# Altium PCB led.PcbDoc (part 2 of 2)
Units mm, origin at the board's own origin, x right, y up, seen from the top; angles counter-clockwise.
Board outline 15 x 336 mm, 2 copper layers (Top Layer, Bottom Layer); 132 components, 245 nets, 940 pads, 191 vias.
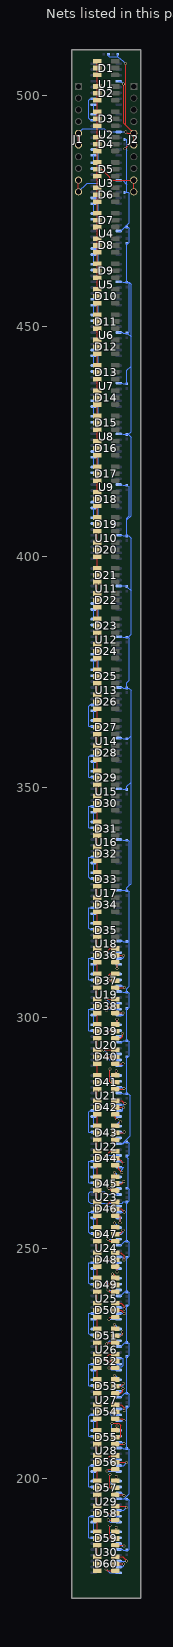
[diagram p2: the nets of this part, all layers, seen from the top]

## Via types
v1: diameter 0.635, hole 0.457, Top Layer to Bottom Layer, 191 vias

## Nets (pads, with @x,y where several pads share a name; then routed paths per layer and width w, separated by ;. In a path a pad name is that pad's centre, name@x,y a point inside that pad or via, vN(x,y) a via of type N, cw(c..) or ccw(c..) an arc to the next point about the centre after c; other vN are vias at no path point) (continued)
NetD36_1: D36.1 U18.8 | length 3
  Top Layer w0.254: D36.1@1024.96,312 1025.373,312 v1(1025.373,310.642)
  Bottom Layer w0.254: v1(1025.373,310.642) 1025.373,311.555 U18.8@1025.725,311.555
NetD36_2: D36.2 U18.7 | length 3.4
  Top Layer w0.254: D36.2@1024.96,313.5 v1(1026.795,313.5)
  Bottom Layer w0.254: U18.7@1025.725,312.825 1026.566,312.825 1026.795,313.054 v1(1026.795,313.5)
NetD36_3: D36.3 U18.6 | length 5
  Top Layer w0.254: v1(1023.01,314.095) 1023.915,315 D36.3@1024.96,315
  Bottom Layer w0.254: v1(1023.01,314.095) U18.6@1025.725,314.095
NetD37_1: D37.1 U19.3 | length 3.4
  Top Layer w0.254: D37.1@1024.96,306.5 v1(1026.947,306.5)
  Bottom Layer w0.254: U19.3@1025.725,306.905 1026.542,306.905 v1(1026.947,306.5)
NetD37_2: D37.2 U19.2 | length 3.8
  Top Layer w0.254: v1(1023.503,308.175) 1023.678,308 D37.2@1024.96,308
  Bottom Layer w0.254: v1(1023.503,308.175) U19.2@1025.725,308.175
NetD37_3: D37.3 U19.1 | length 4
  Top Layer w0.254: v1(1023.671,308.94) 1023.671,309.27 1023.9,309.5 D37.3@1024.96,309.5
  Bottom Layer w0.254: v1(1023.671,308.94) 1024.176,309.445 U19.1@1025.725,309.445
NetD38_1: D38.1 U19.8 | length 3.1
  Top Layer w0.254: D38.1@1024.96,301 v1(1026.693,301)
  Bottom Layer w0.254: U19.8@1025.725,300.555 1026.693,300.555 v1(1026.693,301)
NetD38_2: D38.2 U19.7 | length 5.1
  Top Layer w0.254: v1(1023.036,301.6) 1023.936,302.5 D38.2@1024.96,302.5
  Bottom Layer w0.254: v1(1023.036,301.6) 1023.261,301.825 U19.7@1025.725,301.825
NetD38_3: D38.3 U19.6 | length 5
  Top Layer w0.254: v1(1023.014,304) D38.3@1024.96,304
  Bottom Layer w0.254: v1(1023.014,304) 1023.919,303.095 U19.6@1025.725,303.095
NetD39_1: D39.1 U20.3 | length 3.8
  Top Layer w0.254: D39.1@1024.96,295.5 1026.16,295.5 1026.566,295.906 v1(1026.566,296.52)
  Bottom Layer w0.254: U20.3@1025.725,295.905 1026.566,295.905 v1(1026.566,296.52)
NetD39_2: D39.2 U20.2 | length 4.3
  Top Layer w0.254: v1(1023.214,297) D39.2@1024.96,297
  Bottom Layer w0.254: v1(1023.214,297) 1023.389,297.175 U20.2@1025.725,297.175
NetD39_3: D39.3 U20.1 | length 3.1
  Top Layer w0.254: D39.3@1024.96,298.5 1025.373,298.5 v1(1025.373,299.644)
  Bottom Layer w0.254: v1(1025.373,299.644) 1025.373,298.445 U20.1@1025.725,298.445
NetD40_1: D40.1 U20.8 | length 3
  Top Layer w0.254: D40.1@1024.96,290 v1(1026.693,290)
  Bottom Layer w0.254: U20.8@1025.725,289.555 1026.485,289.555 1026.693,289.763 v1(1026.693,290)
NetD40_2: D40.2 U20.7 | length 5
  Top Layer w0.254: v1(1023.01,291.541) 1023.052,291.5 D40.2@1024.96,291.5
  Bottom Layer w0.254: v1(1023.01,291.541) 1023.727,290.825 U20.7@1025.725,290.825
NetD40_3: D40.3 U20.6 | length 6.2
  Top Layer w0.254: v1(1022.426,293) D40.3@1024.96,293
  Bottom Layer w0.254: v1(1022.426,293) 1023.331,292.095 U20.6@1025.725,292.095
NetD41_1: D41.1 U21.3 | length 3.2
  Top Layer w0.254: D41.1@1024.96,284.5 1026.739,284.5 v1(1026.846,284.607)
  Bottom Layer w0.254: U21.3@1025.725,284.905 1026.548,284.905 v1(1026.846,284.607)
NetD41_2: D41.2 U21.2 | length 8
  Top Layer w0.254: v1(1023.798,288.874) 1023.798,286 D41.2@1024.96,286
  Bottom Layer w0.254: v1(1023.798,288.874) 1023.798,287.318 1024.941,286.175 U21.2@1025.725,286.175
NetD41_3: D41.3 U21.1 | length 2.7
  Top Layer w0.254: D41.3@1024.96,287.5 1025.195,287.5 v1(1025.195,288.417)
  Bottom Layer w0.254: v1(1025.195,288.417) 1025.195,287.445 U21.1@1025.725,287.445
NetD42_1: D42.1 U21.8 | length 2.4
  Top Layer w0.254: D42.1@1024.96,279 1024.941,279 1024.941,278.232 v1(1025.322,277.851)
  Bottom Layer w0.254: v1(1025.322,277.851) 1025.322,278.555 U21.8@1025.725,278.555
NetD42_2: D42.2 U21.7 | length 3.4
  Top Layer w0.254: D42.2@1024.96,280.5 v1(1026.784,280.5)
  Bottom Layer w0.254: U21.7@1025.725,279.825 1026.566,279.825 1026.566,280.283 v1(1026.784,280.5)
NetD42_3: D42.3 U21.6 | length 3.8
  Top Layer w0.254: D42.3@1024.96,282 1026.414,282 v1(1027.074,281.34)
  Bottom Layer w0.254: U21.6@1025.725,281.095 1026.83,281.095 v1(1027.074,281.34)
NetD43_1: D43.1 U22.3 | length 3.5
  Top Layer w0.254: v1(1024.56,272.491) 1024.839,272.771 1024.839,273.5 D43.1@1024.96,273.5
  Bottom Layer w0.254: v1(1024.56,272.491) 1024.746,272.677 1024.746,273.507 1025.144,273.905 U22.3@1025.725,273.905
NetD43_2: D43.2 U22.2 | length 3.2
  Top Layer w0.254: D43.2@1024.96,275 1026.756,275 v1(1026.931,275.175)
  Bottom Layer w0.254: U22.2@1025.725,275.175 v1(1026.931,275.175)
NetD43_3: D43.3 U22.1 | length 3.4
  Top Layer w0.254: D43.3@1024.96,276.5 1025.216,276.5 v1(1026.135,277.419)
  Bottom Layer w0.254: U22.1@1025.725,276.445 1025.322,276.445 1025.322,276.847 1025.893,277.419 v1(1026.135,277.419)
NetD44_1: D44.1 U22.8 | length 5.1
  Top Layer w0.254: D44.1@1024.96,268 1025.721,268 1025.721,267.062 v1(1026.389,266.395)
  Bottom Layer w0.254: U22.8@1025.725,267.555 1026.802,267.555 1026.864,267.493 1026.389,267.017 v1(1026.389,266.395)
NetD44_2: D44.2 U22.7 | length 3.7
  Top Layer w0.254: D44.2@1024.96,269.5 1025.621,269.5 v1(1026.82,268.3)
  Bottom Layer w0.254: U22.7@1025.725,268.825 1026.287,268.825 1026.812,268.3 v1(1026.82,268.3)
NetD44_3: D44.3 U22.6 | length 5
  Top Layer w0.254: v1(1023.01,270.095) 1023.915,271 D44.3@1024.96,271
  Bottom Layer w0.254: v1(1023.01,270.095) U22.6@1025.725,270.095
NetD45_1: D45.1 U23.3 | length 3.7
  Top Layer w0.254: v1(1023.577,262.905) 1023.982,262.5 D45.1@1024.96,262.5
  Bottom Layer w0.254: v1(1023.577,262.905) U23.3@1025.725,262.905
NetD45_2: D45.2 U23.2 | length 3.3
  Top Layer w0.254: D45.2@1024.96,264 1026.356,264 v1(1026.82,264.465)
  Bottom Layer w0.254: U23.2@1025.725,264.175 1026.531,264.175 v1(1026.82,264.465)
NetD45_3: D45.3 U23.1 | length 2.8
  Top Layer w0.254: v1(1024.814,266.395) 1024.814,265.5 D45.3@1024.96,265.5
  Bottom Layer w0.254: v1(1024.814,266.395) 1025.093,266.395 1025.296,266.192 1025.296,265.445 U23.1@1025.725,265.445
NetD46_1: D46.1 U23.8 | length 3.9
  Top Layer w0.254: D46.1@1024.96,257 1026.033,257 v1(1026.033,255.499)
  Bottom Layer w0.254: U23.8@1025.725,256.555 1026.033,256.555 v1(1026.033,255.499)
NetD46_2: D46.2 U23.7 | length 3.4
  Top Layer w0.254: D46.2@1024.96,258.5 1026.247,258.5 v1(1026.922,257.825)
  Bottom Layer w0.254: U23.7@1025.725,257.825 v1(1026.922,257.825)
NetD46_3: D46.3 U23.6 | length 5
  Top Layer w0.254: v1(1023.01,259.095) 1023.915,260 D46.3@1024.96,260
  Bottom Layer w0.254: v1(1023.01,259.095) U23.6@1025.725,259.095
NetD47_1: D47.1 U24.3 | length 4
  Top Layer w0.254: v1(1023.406,251.905) 1023.811,251.5 D47.1@1024.96,251.5
  Bottom Layer w0.254: v1(1023.406,251.905) U24.3@1025.725,251.905
NetD47_2: D47.2 U24.2 | length 3.7
  Top Layer w0.254: D47.2@1024.96,253 1025.957,253 1026.693,253.737 v1(1026.693,253.873)
  Bottom Layer w0.254: U24.2@1025.725,253.175 1026.478,253.175 1026.693,253.39 v1(1026.693,253.873)
NetD47_3: D47.3 U24.1 | length 2.7
  Top Layer w0.254: v1(1024.814,255.397) 1024.814,254.5 D47.3@1024.96,254.5
  Bottom Layer w0.254: v1(1024.814,255.397) 1024.941,255.397 1025.296,255.041 1025.296,254.445 U24.1@1025.725,254.445
NetD48_1: D48.1 U24.8 | length 2.6
  Top Layer w0.254: D48.1@1024.96,246 1025.373,246 v1(1025.373,244.856)
  Bottom Layer w0.254: v1(1025.373,244.856) 1025.373,245.555 U24.8@1025.725,245.555
NetD48_2: D48.2 U24.7 | length 4
  Top Layer w0.254: v1(1023.505,247.5) D48.2@1024.96,247.5
  Bottom Layer w0.254: v1(1023.505,247.5) 1024.18,246.825 U24.7@1025.725,246.825
NetD48_3: D48.3 U24.6 | length 4.9
  Top Layer w0.254: D48.3@1024.96,249 1026.207,249 1026.897,248.31 v1(1026.897,247.396)
  Bottom Layer w0.254: U24.6@1025.725,248.095 1026.693,248.095 1026.693,247.599 v1(1026.897,247.396)
NetD49_1: D49.1 U25.3 | length 4
  Top Layer w0.254: v1(1023.404,240.905) 1023.809,240.5 D49.1@1024.96,240.5
  Bottom Layer w0.254: v1(1023.404,240.905) U25.3@1025.725,240.905
NetD49_2: D49.2 U25.2 | length 4.4
  Top Layer w0.254: v1(1023.322,242.476) 1023.798,242 D49.2@1024.96,242
  Bottom Layer w0.254: v1(1023.322,242.476) 1023.623,242.175 U25.2@1025.725,242.175
NetD49_3: D49.3 U25.1 | length 3.3
  Top Layer w0.254: v1(1024.407,244.399) 1024.534,244.399 1024.814,244.119 1024.814,243.5 D49.3@1024.96,243.5
  Bottom Layer w0.254: v1(1024.407,244.399) 1024.814,243.992 1024.814,243.445 U25.1@1025.725,243.445
NetD50_1: D50.1 U25.8 | length 3.7
  Top Layer w0.254: v1(1023.645,234.555) 1023.645,234.721 1023.925,235 D50.1@1024.96,235
  Bottom Layer w0.254: v1(1023.645,234.555) U25.8@1025.725,234.555
NetD50_2: D50.2 U25.7 | length 3.4
  Top Layer w0.254: D50.2@1024.96,236.5 1026.247,236.5 v1(1026.922,235.825)
  Bottom Layer w0.254: U25.7@1025.725,235.825 v1(1026.922,235.825)
NetD50_3: D50.3 U25.6 | length 4.2
  Top Layer w0.254: D50.3@1024.96,238 1026.26,238 1026.922,237.338 v1(1026.922,236.753)
  Bottom Layer w0.254: U25.6@1025.725,237.095 1026.58,237.095 v1(1026.922,236.753)
NetD51_1: D51.1 U26.3 | length 4.9
  Top Layer w0.254: v1(1023.087,229.184) 1023.402,229.5 D51.1@1024.96,229.5
  Bottom Layer w0.254: v1(1023.087,229.184) 1023.807,229.905 U26.3@1025.725,229.905
NetD51_2: D51.2 U26.2 | length 3.7
  Top Layer w0.254: D51.2@1024.96,231 1026.16,231 1026.592,231.432 v1(1026.592,231.8)
  Bottom Layer w0.254: U26.2@1025.725,231.175 1026.592,231.175 v1(1026.592,231.8)
NetD51_3: D51.3 U26.1 | length 2.7
  Top Layer w0.254: v1(1024.814,233.401) 1024.814,232.5 D51.3@1024.96,232.5
  Bottom Layer w0.254: v1(1024.814,233.401) 1024.966,233.401 1025.296,233.07 1025.296,232.445 U26.1@1025.725,232.445
NetD52_1: D52.1 U26.8 | length 3.6
  Top Layer w0.254: v1(1023.645,224) D52.1@1024.96,224
  Bottom Layer w0.254: v1(1023.645,224) 1024.09,223.555 U26.8@1025.725,223.555
NetD52_2: D52.2 U26.7 | length 3.9
  Top Layer w0.254: v1(1023.645,225.755) 1023.901,225.5 D52.2@1024.96,225.5
  Bottom Layer w0.254: v1(1023.645,225.755) 1024.576,224.825 U26.7@1025.725,224.825
NetD52_3: D52.3 U26.6 | length 9.9
  Top Layer w0.254: v1(1023.595,224.942) 1023.061,225.476 1023.061,226.365 1023.696,227 D52.3@1024.96,227
  Bottom Layer w0.254: v1(1023.595,224.942) 1024.331,224.206 1026.389,224.206 1026.719,224.536 1026.719,226.095 U26.6@1025.725,226.095
NetD53_1: D53.1 U27.3 | length 4
  Top Layer w0.254: D53.1@1024.96,218.5 1026.16,218.5 1026.643,218.983 v1(1026.643,219.558)
  Bottom Layer w0.254: U27.3@1025.725,218.905 1026.617,218.905 1026.617,219.532 v1(1026.643,219.558)
NetD53_2: D53.2 U27.2 | length 3.4
  Top Layer w0.254: D53.2@1024.96,220 1026.135,220 v1(1026.719,220.584)
  Bottom Layer w0.254: U27.2@1025.725,220.175 1026.719,220.175 v1(1026.719,220.584)
NetD53_3: D53.3 U27.1 | length 2.7
  Top Layer w0.254: v1(1024.814,222.402) 1024.814,221.5 D53.3@1024.96,221.5
  Bottom Layer w0.254: v1(1024.814,222.402) 1024.992,222.402 1025.296,222.098 1025.296,221.445 U27.1@1025.725,221.445
NetD54_1: D54.1 U27.8 | length 3.3
  Top Layer w0.254: D54.1@1024.96,213 1026.452,213 v1(1026.897,212.555)
  Bottom Layer w0.254: U27.8@1025.725,212.555 v1(1026.897,212.555)
NetD54_2: D54.2 U27.7 | length 5.2
  Top Layer w0.254: v1(1023.01,214.859) 1023.369,214.5 D54.2@1024.96,214.5
  Bottom Layer w0.254: v1(1023.01,214.859) 1024.044,213.825 U27.7@1025.725,213.825
NetD54_3: D54.3 U27.6 | length 4.2
  Top Layer w0.254: D54.3@1024.96,216 1026.314,216 1026.922,215.392 v1(1026.922,214.757)
  Bottom Layer w0.254: U27.6@1025.725,215.095 1026.584,215.095 v1(1026.922,214.757)
NetD55_1: D55.1 U28.3 | length 3.2
  Top Layer w0.254: D55.1@1024.96,207.5 1026.701,207.5 v1(1026.846,207.645)
  Bottom Layer w0.254: U28.3@1025.725,207.905 1026.586,207.905 v1(1026.846,207.645)
NetD55_2: D55.2 U28.2 | length 9.8
  Top Layer w0.254: v1(1024.23,211.988) 1025.754,211.988 1026.185,211.557 1026.185,209.229 1025.957,209 D55.2@1024.96,209
  Bottom Layer w0.254: v1(1024.23,211.988) 1024.23,209.702 1024.757,209.175 U28.2@1025.725,209.175
NetD55_3: D55.3 U28.1 | length 2.6
  Top Layer w0.254: D55.3@1024.96,210.5 1025.322,210.5 v1(1025.322,211.404)
  Bottom Layer w0.254: v1(1025.322,211.404) 1025.322,210.445 U28.1@1025.725,210.445
NetD56_1: D56.1 U28.8 | length 4.4
  Top Layer w0.254: v1(1023.214,201.676) 1023.538,202 D56.1@1024.96,202
  Bottom Layer w0.254: v1(1023.214,201.676) 1023.335,201.555 U28.8@1025.725,201.555
NetD56_2: D56.2 U28.7 | length 4.5
  Top Layer w0.254: D56.2@1024.96,203.5 v1(1027.455,203.5)
  Bottom Layer w0.254: U28.7@1025.725,202.825 1026.78,202.825 v1(1027.455,203.5)
NetD56_3: D56.3 U28.6 | length 5
  Top Layer w0.254: v1(1023.01,204.095) 1023.915,205 D56.3@1024.96,205
  Bottom Layer w0.254: v1(1023.01,204.095) U28.6@1025.725,204.095
NetD57_1: D57.1 U29.3 | length 3.3
  Top Layer w0.254: D57.1@1024.96,196.5 1026.592,196.5 1026.724,196.367 v1(1026.846,196.367)
  Bottom Layer w0.254: U29.3@1025.725,196.905 1026.308,196.905 v1(1026.846,196.367)
NetD57_2: D57.2 U29.2 | length 8
  Top Layer w0.254: v1(1023.798,200.863) 1023.798,198 D57.2@1024.96,198
  Bottom Layer w0.254: v1(1023.798,200.863) 1023.798,199.318 1024.941,198.175 U29.2@1025.725,198.175
NetD57_3: D57.3 U29.1 | length 2.6
  Top Layer w0.254: D57.3@1024.96,199.5 1025.195,199.5 v1(1025.195,200.406)
  Bottom Layer w0.254: v1(1025.195,200.406) 1025.195,199.445 U29.1@1025.725,199.445
NetD58_1: D58.1 U29.8 | length 4
  Top Layer w0.254: v1(1023.455,191) D58.1@1024.96,191
  Bottom Layer w0.254: v1(1023.455,191) 1023.9,190.555 U29.8@1025.725,190.555
NetD58_2: D58.2 U29.7 | length 5
  Top Layer w0.254: v1(1023.01,192.532) 1023.042,192.5 D58.2@1024.96,192.5
  Bottom Layer w0.254: v1(1023.01,192.532) 1023.717,191.825 U29.7@1025.725,191.825
NetD58_3: D58.3 U29.6 | length 4.5
  Top Layer w0.254: D58.3@1024.96,194 1027.181,194 v1(1027.43,193.751)
  Bottom Layer w0.254: U29.6@1025.725,193.095 1026.774,193.095 v1(1027.43,193.751)
NetD59_1: D59.1 U30.3 | length 3.3
  Top Layer w0.254: D59.1@1024.96,185.5 1026.715,185.5 v1(1026.846,185.369)
  Bottom Layer w0.254: U30.3@1025.725,185.905 1025.982,185.905 1026.518,185.369 v1(1026.846,185.369)
NetD59_2: D59.2 U30.2 | length 8
  Top Layer w0.254: v1(1023.798,189.865) 1023.798,187 D59.2@1024.96,187
  Bottom Layer w0.254: v1(1023.798,189.865) 1023.798,188.318 1024.941,187.175 U30.2@1025.725,187.175
NetD59_3: D59.3 U30.1 | length 2.6
  Top Layer w0.254: D59.3@1024.96,188.5 1025.195,188.5 v1(1025.195,189.408)
  Bottom Layer w0.254: v1(1025.195,189.408) 1025.195,188.445 U30.1@1025.725,188.445
NetD60_1: D60.1 U30.8 | length 5.2
  Top Layer w0.254: v1(1023.01,180.365) 1023.376,180 D60.1@1024.96,180
  Bottom Layer w0.254: v1(1023.01,180.365) 1023.821,179.555 U30.8@1025.725,179.555
NetD60_2: D60.2 U30.7 | length 3.4
  Top Layer w0.254: D60.2@1024.96,181.5 1026.778,181.5 v1(1026.795,181.483)
  Bottom Layer w0.254: U30.7@1025.725,180.825 1026.569,180.825 1026.795,181.051 v1(1026.795,181.483)
NetD60_3: D60.3 U30.6 | length 4.6
  Top Layer w0.254: D60.3@1024.96,183 1026.599,183 v1(1027.455,182.143)
  Bottom Layer w0.254: U30.6@1025.725,182.095 1027.407,182.095 v1(1027.455,182.143)
NetU1_9: U1.9 U2.16 | length 2.1
  Bottom Layer w0.254: U2.16@1020.275,495.945 U1.9@1020.275,498.055
NetU1_10: U1.10 U2.15 | length 6.3
  Bottom Layer w0.254: U2.15@1020.275,494.675 1019.655,494.675 1019.277,495.053 1019.277,499.059 1019.542,499.325 U1.10@1020.275,499.325
NetU2_9: U2.9 U3.16 | length 1.6
  Bottom Layer w0.254: U3.16@1020.275,485.445 U2.9@1020.275,487.055
NetU2_10: U2.10 U3.15 | length 5.8
  Bottom Layer w0.254: U3.15@1020.275,484.175 1021.004,484.175 1021.258,484.429 1021.258,488.086 1021.019,488.325 U2.10@1020.275,488.325
NetU3_9: U3.9 U4.16 | length 2.1
  Bottom Layer w0.254: U4.16@1020.275,474.445 U3.9@1020.275,476.555
NetU3_10: U3.10 U4.15 | length 6.6
  Bottom Layer w0.254: U4.15@1020.275,473.175 1021.258,473.175 1021.258,477.825 U3.10@1020.275,477.825
NetU4_9: U4.9 U5.16 | length 2.1
  Bottom Layer w0.254: U5.16@1020.275,463.445 U4.9@1020.275,465.555
NetU4_10: U4.10 U5.15 | length 6.6
  Bottom Layer w0.254: U5.15@1020.275,462.175 1021.258,462.175 1021.258,466.825 U4.10@1020.275,466.825
NetU5_9: U5.9 U6.16 | length 2.1
  Bottom Layer w0.254: U6.16@1020.275,452.445 U5.9@1020.275,454.555
NetU5_10: U5.10 U6.15 | length 6.5
  Bottom Layer w0.254: U6.15@1020.275,451.175 1021.258,451.175 1021.258,455.574 1021.007,455.825 U5.10@1020.275,455.825
NetU6_9: U6.9 U7.16 | length 2.1
  Bottom Layer w0.254: U7.16@1020.275,441.445 U6.9@1020.275,443.555
NetU6_10: U6.10 U7.15 | length 6.5
  Bottom Layer w0.254: U7.15@1020.275,440.175 1021.258,440.175 1021.258,444.602 1021.034,444.825 U6.10@1020.275,444.825
NetU7_9: U7.9 U8.16 | length 2.1
  Bottom Layer w0.254: U8.16@1020.275,430.445 U7.9@1020.275,432.555
NetU7_10: U7.10 U8.15 | length 6.6
  Bottom Layer w0.254: U8.15@1020.275,429.175 1021.258,429.175 1021.258,433.825 U7.10@1020.275,433.825
NetU8_9: U8.9 U9.16 | length 2.1
  Bottom Layer w0.254: U9.16@1020.275,419.445 U8.9@1020.275,421.555
NetU8_10: U8.10 U9.15 | length 6.5
  Bottom Layer w0.254: U9.15@1020.275,418.175 1021.044,418.175 1021.258,418.389 1021.258,422.825 U8.10@1020.275,422.825
NetU9_9: U9.9 U10.16 | length 2.1
  Bottom Layer w0.254: U10.16@1020.275,408.445 U9.9@1020.275,410.555
NetU9_10: U9.10 U10.15 | length 6.5
  Bottom Layer w0.254: U10.15@1020.275,407.175 1021.017,407.175 1021.258,407.416 1021.258,411.825 U9.10@1020.275,411.825
NetU11_9: U11.9 U12.16 | length 2.1
  Bottom Layer w0.254: U12.16@1020.275,386.445 U11.9@1020.275,388.555
NetU11_10: U11.10 U12.15 | length 6.6
  Bottom Layer w0.254: U12.15@1020.275,385.175 1021.258,385.175 1021.258,389.825 U11.10@1020.275,389.825
NetU12_9: U12.9 U13.16 | length 2.1
  Bottom Layer w0.254: U13.16@1020.275,375.445 U12.9@1020.275,377.555
NetU12_10: U12.10 U13.15 | length 6.6
  Bottom Layer w0.254: U13.15@1020.275,374.175 1021.258,374.175 1021.258,378.825 U12.10@1020.275,378.825
NetU13_9: U13.9 U14.16 | length 2.1
  Bottom Layer w0.254: U14.16@1020.275,364.445 U13.9@1020.275,366.555
NetU13_10: U13.10 U14.15 | length 6.5
  Bottom Layer w0.254: U14.15@1020.275,363.175 1019.277,363.175 1019.277,367.589 1019.513,367.825 U13.10@1020.275,367.825
NetU14_9: U14.9 U15.16 | length 2.1
  Bottom Layer w0.254: U15.16@1020.275,353.445 U14.9@1020.275,355.555
NetU14_10: U14.10 U15.15 | length 6.5
  Bottom Layer w0.254: U15.15@1020.275,352.175 1019.277,352.175 1019.277,356.616 1019.486,356.825 U14.10@1020.275,356.825
NetU15_9: U15.9 U16.16 | length 2.1
  Bottom Layer w0.254: U16.16@1020.275,342.445 U15.9@1020.275,344.555
NetU15_10: U15.10 U16.15 | length 6.6
  Bottom Layer w0.254: U16.15@1020.275,341.175 1019.277,341.175 1019.277,345.825 U15.10@1020.275,345.825
NetU16_9: U16.9 U17.16 | length 2.1
  Bottom Layer w0.254: U17.16@1020.275,331.445 U16.9@1020.275,333.555
NetU16_10: U16.10 U17.15 | length 6.5
  Bottom Layer w0.254: U17.15@1020.275,330.175 1019.505,330.175 1019.277,330.403 1019.277,334.825 U16.10@1020.275,334.825
NetU17_9: U17.9 U18.16 | length 2.1
  Bottom Layer w0.254: U18.16@1020.275,320.445 U17.9@1020.275,322.555
NetU17_10: U17.10 U18.15 | length 6.5
  Bottom Layer w0.254: U18.15@1020.275,319.175 1019.532,319.175 1019.277,319.43 1019.277,323.825 U17.10@1020.275,323.825
NetU18_9: U18.9 U19.16 | length 2.1
  Bottom Layer w0.254: U19.16@1020.275,309.445 U18.9@1020.275,311.555
NetU18_10: U18.10 U19.15 | length 6.6
  Bottom Layer w0.254: U19.15@1020.275,308.175 1019.277,308.175 1019.277,312.825 U18.10@1020.275,312.825
NetU19_9: U19.9 U20.16 | length 2.1
  Bottom Layer w0.254: U20.16@1020.275,298.445 U19.9@1020.275,300.555
NetU19_10: U19.10 U20.15 | length 6.6
  Bottom Layer w0.254: U20.15@1020.275,297.175 1019.277,297.175 1019.277,301.825 U19.10@1020.275,301.825
NetU21_9: U21.9 U22.16 | length 2.1
  Bottom Layer w0.254: U22.16@1020.275,276.445 U21.9@1020.275,278.555
NetU21_10: U21.10 U22.15 | length 6.5
  Bottom Layer w0.254: U22.15@1020.275,275.175 1019.277,275.175 1019.277,279.603 1019.498,279.825 U21.10@1020.275,279.825
NetU22_9: U22.9 U23.16 | length 2.1
  Bottom Layer w0.254: U23.16@1020.275,265.445 U22.9@1020.275,267.555
NetU22_10: U22.10 U23.15 | length 6.6
  Bottom Layer w0.254: U23.15@1020.275,264.175 1019.277,264.175 1019.277,268.825 U22.10@1020.275,268.825
NetU23_9: U23.9 U24.16 | length 2.1
  Bottom Layer w0.254: U24.16@1020.275,254.445 U23.9@1020.275,256.555
NetU23_10: U23.10 U24.15 | length 6.5
  Bottom Layer w0.254: U24.15@1020.275,253.175 1019.492,253.175 1019.277,253.39 1019.277,257.825 U23.10@1020.275,257.825
NetU24_9: U24.9 U25.16 | length 2.1
  Bottom Layer w0.254: U25.16@1020.275,243.445 U24.9@1020.275,245.555
NetU24_10: U24.10 U25.15 | length 6.5
  Bottom Layer w0.254: U25.15@1020.275,242.175 1019.519,242.175 1019.277,242.418 1019.277,246.825 U24.10@1020.275,246.825
NetU25_9: U25.9 U26.16 | length 2.1
  Bottom Layer w0.254: U26.16@1020.275,232.445 U25.9@1020.275,234.555
NetU25_10: U25.10 U26.15 | length 6.5
  Bottom Layer w0.254: U26.15@1020.275,231.175 1019.546,231.175 1019.277,231.445 1019.277,235.825 U25.10@1020.275,235.825
NetU26_9: U26.9 U27.16 | length 2.1
  Bottom Layer w0.254: U27.16@1020.275,221.445 U26.9@1020.275,223.555
NetU26_10: U26.10 U27.15 | length 6.6
  Bottom Layer w0.254: U27.15@1020.275,220.175 1019.277,220.175 1019.277,224.825 U26.10@1020.275,224.825
NetU27_9: U27.9 U28.16 | length 2.1
  Bottom Layer w0.254: U28.16@1020.275,210.445 U27.9@1020.275,212.555
NetU27_10: U27.10 U28.15 | length 6.5
  Bottom Layer w0.254: U28.15@1020.275,209.175 1019.277,209.175 1019.277,213.563 1019.538,213.825 U27.10@1020.275,213.825
NetU28_9: U28.9 U29.16 | length 2.1
  Bottom Layer w0.254: U29.16@1020.275,199.445 U28.9@1020.275,201.555
NetU28_10: U28.10 U29.15 | length 6.5
  Bottom Layer w0.254: U29.15@1020.275,198.175 1019.277,198.175 1019.277,202.59 1019.511,202.825 U28.10@1020.275,202.825
NetU29_9: U29.9 U30.16 | length 2.1
  Bottom Layer w0.254: U30.16@1020.275,188.445 U29.9@1020.275,190.555
NetU29_10: U29.10 U30.15 | length 6.5
  Bottom Layer w0.254: U30.15@1020.275,187.175 1019.277,187.175 1019.277,191.618 1019.484,191.825 U29.10@1020.275,191.825
VCC: C1.1 C2.1 C3.1 C4.1 C5.1 C6.1 C7.1 C8.1 C9.1 C10.1 C11.2 C12.2 C13.2 C14.2 C15.2 C16.2 C17.2 C18.2 C19.2 C20.2 C21.1 C22.1 C23.1 C24.1 C25.1 C26.1 C27.1 C28.1 C29.1 C30.1 C31.2 C32.2 C33.2 C34.2 C35.2 C36.2 C37.2 C38.2 C39.2 C40.2 J1.5 J1.6 J2.5 J2.6 U1.4 U2.4 U3.4 U4.4 U5.4 U6.4 U7.4 U8.4 U9.4 U10.4 U11.4 U12.4 U13.4 U14.4 U15.4 U16.4 U17.4 U18.4 U19.4 U20.4 U21.4 U22.4 U23.4 U24.4 U25.4 U26.4 U27.4 U28.4 U29.4 U30.4 | length 488.5
  Top Layer w0.254: J1.6@1017,489.3 J1.5@1017,491.84 ; v1(1026.781,502.514) 1026.781,494.059 1027.222,493.618 ; v1(1027.125,488.493) 1027.932,489.3 J2.6@1029,489.3 J2.5@1029,491.84 ; v1(1027.222,506.989) 1027.222,493.618 ; v1(1027.252,492.135) 1027.547,491.84 J2.5@1029,491.84 ; 1027.222,493.618 J2.5@1029,491.84
  Bottom Layer w0.254: J1.6@1017,489.3 J1.5@1017,491.84 1017.971,492.811 1022.639,492.811 1023.315,492.135 U2.4@1025.725,492.135 v1(1027.252,492.135) ; C11.2@1023.5,509 1023.5,508.704 1023.722,508.483 1025.5,508.483 ; C1.1@1025.5,509 1025.5,508.483 ; U30.4@1025.725,184.635 1026.541,184.635 1026.676,184.5 C35.2@1027.5,184.5 1027.805,184.5 1028.014,184.709 1028.014,195.275 1027.789,195.5 C34.2@1027.5,195.5 1027.238,195.5 1027.103,195.635 1026.977,195.635 ; U29.4@1025.725,195.635 1026.977,195.635 ; U28.4@1025.725,206.635 1026.541,206.635 1026.676,206.5 C33.2@1027.5,206.5 ; U27.4@1025.725,217.635 1026.16,217.635 1027.025,218.5 C32.2@1027.5,218.5 ; U26.4@1025.725,228.635 1026.16,228.635 1027.025,229.5 C10.1@1027.5,229.5 ; U25.4@1025.725,239.635 1026.16,239.635 1027.025,240.5 C30.1@1027.5,240.5 ; U24.4@1025.725,250.635 1026.16,250.635 1027.025,251.5 C29.1@1027.5,251.5 ; U23.4@1025.725,261.635 1023.122,261.635 1022.553,262.204 1019.556,262.204 1019.277,261.925 1019.277,260.096 1019.632,259.74 1026.459,259.74 1026.719,260 C28.1@1027.5,260 ; U22.4@1025.725,272.635 1026.456,272.635 ; U21.4@1025.725,283.635 1026.541,283.635 1026.676,283.5 C26.1@1027.5,283.5 ; U20.4@1025.725,294.635 1026.414,294.635 1026.779,295 C8.1@1027.5,295 ; U19.4@1025.725,305.635 1026.541,305.635 1026.676,305.5 C24.1@1027.5,305.5 ; U18.4@1025.725,316.635 1026.541,316.635 1026.676,316.5 C7.1@1027.5,316.5 1027.786,316.5 1028.014,316.729 ; U17.4@1025.725,327.635 1027.094,327.635 1027.229,327.5 C5.1@1027.5,327.5 ; U16.4@1025.725,338.635 1026.541,338.635 1026.676,338.5 C23.1@1027.5,338.5 1027.786,338.5 1028.04,338.246 1028.04,328.708 ; U15.4@1025.725,349.635 1026.541,349.635 1026.676,349.5 C6.1@1027.5,349.5 1027.5,350.209 1028.395,351.104 ; U14.4@1025.725,360.635 1026.541,360.635 1026.676,360.5 C21.1@1027.5,360.5 1027.786,360.5 1028.395,361.11 ; U13.4@1025.725,371.635 1026.541,371.635 1026.676,371.5 C20.2@1027.5,371.5 ; U12.4@1025.725,382.635 1026.541,382.635 1026.676,382.5 C19.2@1027.5,382.5 1027.786,382.5 ; U11.4@1025.725,393.635 1027.379,393.635 C18.2@1027.507,393.507 ; U10.4@1025.725,404.635 1026.541,404.635 1026.676,404.5 C17.2@1027.5,404.5 ; U9.4@1025.725,415.635 1026.541,415.635 1026.676,415.5 C4.1@1027.5,415.5 1028.014,415.246 1028.014,408.889 1027.5,408.375 1027.5,407.994 ; U8.4@1025.725,426.635 1026.541,426.635 1026.676,426.5 C22.1@1027.5,426.5 ; U7.4@1025.725,437.635 1026.541,437.635 1026.676,437.5 C3.1@1027.5,437.5 1027.5,440.385 1028.395,441.28 ; U6.4@1025.725,448.635 1026.541,448.635 1026.676,448.5 C16.2@1027.5,448.5 C16.2@1027.608,448.5 ; U5.4@1025.725,459.635 1026.541,459.635 1026.676,459.5 C15.2@1027.5,459.5 ; U4.4@1025.725,470.635 U4.4@1026.16,470.635 ; U3.4@1025.725,481.635 1026.566,481.635 ; U1.4@1025.725,503.135 1026.16,503.135 v1(1026.781,502.514) ; C13.2@1027,479 1027.506,479 ; C12.2@1027,490.5 1027.506,490.5 1027.506,488.112 ; v1(1027.125,488.493) 1027.506,488.112 ; v1(1027.222,506.989) 1025.5,508.483 ; C9.1@1027.5,263 1027.786,263 ; C18.2@1027.5,393.5 C18.2@1027.507,393.507 ; U4.4@1026.16,470.635 1026.209,470.635 1027.074,471.5 ; U4.4@1026.16,470.635 1027.025,471.5 1027.074,471.5 ; 1026.456,272.635 1028.192,274.371 1028.192,283.094 1027.786,283.5 C26.1@1027.5,283.5 ; 1026.456,272.635 1026.66,272.635 1027.025,273 C27.1@1027.5,273 1027.786,273 1028.014,272.771 1028.014,270.205 1027.809,270 C39.2@1027.5,270 1027.5,269.694 1027.796,269.398 1027.796,263.011 1027.786,263 ; 1026.566,481.635 1027.354,481.635 1027.506,481.787 ; 1026.566,481.635 1027.506,480.695 ; 1026.977,195.635 1028.04,196.698 1028.04,206.248 1027.788,206.5 C33.2@1027.5,206.5 ; 1027.074,471.5 1028.04,472.465 1028.04,478.746 1027.786,479 1027.506,479 ; 1027.074,471.5 C2.1@1027.5,471.5 1027.786,471.5 1028.014,471.271 1028.014,468.224 1027.791,468 C14.2@1027.5,468 C15.2@1027.5,459.5 ; C33.2@1027.5,206.5 C36.2@1027.5,215.5 1027.792,215.5 1028.014,215.722 1028.014,218.271 1027.786,218.5 C32.2@1027.5,218.5 ; C32.2@1027.5,218.5 C31.2@1027.5,226.5 1027.794,226.5 1028.014,226.72 1028.014,229.271 1027.786,229.5 C10.1@1027.5,229.5 ; C10.1@1027.5,229.5 C37.2@1027.5,237.5 1027.796,237.5 1028.014,237.719 1028.014,240.271 1027.786,240.5 C30.1@1027.5,240.5 ; C30.1@1027.5,240.5 C38.2@1027.5,248 1027.805,248 1028.014,248.209 1028.014,251.271 1027.786,251.5 C29.1@1027.5,251.5 ; C29.1@1027.5,251.5 C28.1@1027.5,260 ; C28.1@1027.5,260 1027.786,260 1028.014,260.229 1028.014,262.771 1027.786,263 ; C26.1@1027.5,283.5 C25.1@1027.5,291.5 1027.795,291.5 1028.014,291.719 1028.014,294.771 1027.786,295 C8.1@1027.5,295 ; C8.1@1027.5,295 C40.2@1027.5,302 1027.786,302 1028.014,302.229 1028.014,305.271 1027.786,305.5 C24.1@1027.5,305.5 ; C24.1@1027.5,305.5 1027.5,306.242 1028.014,306.756 1028.014,316.729 ; C5.1@1027.5,327.5 1027.5,328.168 1028.04,328.708 ; C5.1@1027.5,327.5 1027.786,327.5 1028.014,327.271 1028.014,316.729 ; C20.2@1027.5,371.5 1027.938,371.5 1028.395,371.043 1028.395,361.11 ; C20.2@1027.5,371.5 1027.5,372.637 1028.04,373.177 1028.04,382.246 1027.786,382.5 ; C17.2@1027.5,404.5 1027.5,407.994 ; C17.2@1027.5,404.5 1027.857,404.5 1028.395,403.962 1028.395,392.619 ; 1027.5,407.994 1028.395,408.889 1028.395,425.907 1027.798,426.504 ; C22.1@1027.5,426.5 1027.798,426.504 ; C22.1@1027.5,426.5 1027.794,426.5 1027.798,426.504 ; C15.2@1027.5,459.5 1027.786,459.5 ; 1027.506,479 1027.506,480.695 ; 1027.506,480.695 1027.506,481.787 ; 1027.506,481.787 1027.506,488.112 ; C18.2@1027.507,393.507 1028.395,392.619 ; C16.2@1027.608,448.5 1027.786,448.5 1028.04,448.754 1028.04,459.246 1027.786,459.5 ; C16.2@1027.608,448.5 1028.395,447.713 ; 1027.786,382.5 1028.395,383.11 1028.395,392.619 ; 1027.786,459.5 1028.04,459.5 1028.395,459.144 1028.395,447.713 ; 1027.798,426.504 1028.395,427.101 1028.395,441.28 ; 1028.04,328.708 1028.395,329.063 1028.395,351.104 ; 1028.395,351.104 1028.395,361.11 ; 1028.395,441.28 1028.395,447.713
VCCBAT: D1.4 D1.5 D1.6 D2.4 D2.5 D2.6 D3.4 D3.5 D3.6 D4.4 D4.5 D4.6 D5.4 D5.5 D5.6 D6.4 D6.5 D6.6 D7.4 D7.5 D7.6 D8.4 D8.5 D8.6 D9.4 D9.5 D9.6 D10.4 D10.5 D10.6 D11.4 D11.5 D11.6 D12.4 D12.5 D12.6 D13.4 D13.5 D13.6 D14.4 D14.5 D14.6 D15.4 D15.5 D15.6 D16.4 D16.5 D16.6 D17.4 D17.5 D17.6 D18.4 D18.5 D18.6 D19.4 D19.5 D19.6 D20.4 D20.5 D20.6 D21.4 D21.5 D21.6 D22.4 D22.5 D22.6 D23.4 D23.5 D23.6 D24.4 D24.5 D24.6 D25.4 D25.5 D25.6 D26.4 D26.5 D26.6 D27.4 D27.5 D27.6 D28.4 D28.5 D28.6 D29.4 D29.5 D29.6 D30.4 D30.5 D30.6 D31.4 D31.5 D31.6 D32.4 D32.5 D32.6 D33.4 D33.5 D33.6 D34.4 D34.5 D34.6 D35.4 D35.5 D35.6 D36.4 D36.5 D36.6 D37.4 D37.5 D37.6 D38.4 D38.5 D38.6 D39.4 D39.5 D39.6 D40.4 D40.5 D40.6 D41.4 D41.5 D41.6 D42.4 D42.5 D42.6 D43.4 D43.5 D43.6 D44.4 D44.5 D44.6 D45.4 D45.5 D45.6 D46.4 D46.5 D46.6 D47.4 D47.5 D47.6 D48.4 D48.5 D48.6 D49.4 D49.5 D49.6 D50.4 D50.5 D50.6 D51.4 D51.5 D51.6 D52.4 D52.5 D52.6 D53.4 D53.5 D53.6 D54.4 D54.5 D54.6 D55.4 D55.5 D55.6 D56.4 D56.5 D56.6 D57.4 D57.5 D57.6 D58.4 D58.5 D58.6 D59.4 D59.5 D59.6 D60.4 D60.5 D60.6 J1.9 J1.10 J2.9 J2.10 | length 347.2
  Top Layer w0.254: J1.10@1017,479.14 J1.9@1017,481.68 ; D60.6@1021.04,180 D60.5@1021.04,181.5 D60.4@1021.04,183 D59.6@1021.04,185.5 D59.5@1021.04,187 D59.4@1021.04,188.5 D58.6@1021.04,191 D58.5@1021.04,192.5 D58.4@1021.04,194 D57.6@1021.04,196.5 D57.5@1021.04,198 D57.4@1021.04,199.5 D56.6@1021.04,202 D56.5@1021.04,203.5 D56.4@1021.04,205 D55.6@1021.04,207.5 D55.5@1021.04,209 D55.4@1021.04,210.5 D54.6@1021.04,213 D54.5@1021.04,214.5 D54.4@1021.04,216 D53.6@1021.04,218.5 D53.5@1021.04,220 D53.4@1021.04,221.5 D52.6@1021.04,224 D52.5@1021.04,225.5 D52.4@1021.04,227 D51.6@1021.04,229.5 D51.5@1021.04,231 D51.4@1021.04,232.5 D50.6@1021.04,235 D50.5@1021.04,236.5 D50.4@1021.04,238 D49.6@1021.04,240.5 D49.5@1021.04,242 D49.4@1021.04,243.5 D48.6@1021.04,246 D48.5@1021.04,247.5 D48.4@1021.04,249 D47.6@1021.04,251.5 D47.5@1021.04,253 D47.4@1021.04,254.5 D46.6@1021.04,257 D46.5@1021.04,258.5 D46.4@1021.04,260 D45.6@1021.04,262.5 D45.5@1021.04,264 D45.4@1021.04,265.5 D44.6@1021.04,268 D44.5@1021.04,269.5 D44.4@1021.04,271 D43.6@1021.04,273.5 D43.5@1021.04,275 D43.4@1021.04,276.5 D42.6@1021.04,279 D42.5@1021.04,280.5 D42.4@1021.04,282 D41.6@1021.04,284.5 D41.5@1021.04,286 D41.4@1021.04,287.5 D40.6@1021.04,290 D40.5@1021.04,291.5 D40.4@1021.04,293 D39.6@1021.04,295.5 D39.5@1021.04,297 D39.4@1021.04,298.5 D38.6@1021.04,301 D38.5@1021.04,302.5 D38.4@1021.04,304 D37.6@1021.04,306.5 D37.5@1021.04,308 D37.4@1021.04,309.5 D36.6@1021.04,312 D36.5@1021.04,313.5 D36.4@1021.04,315 D35.6@1021.04,317.5 D35.5@1021.04,319 D35.4@1021.04,320.5 D34.6@1021.04,323 D34.5@1021.04,324.5 D34.4@1021.04,326 D33.6@1021.04,328.5 D33.5@1021.04,330 D33.4@1021.04,331.5 D32.6@1021.04,334 D32.5@1021.04,335.5 D32.4@1021.04,337 D31.6@1021.04,339.5 D31.5@1021.04,341 D31.4@1021.04,342.5 D30.6@1021.04,345 D30.5@1021.04,346.5 D30.4@1021.04,348 D29.6@1021.04,350.5 D29.5@1021.04,352 D29.4@1021.04,353.5 D28.6@1021.04,356 D28.5@1021.04,357.5 D28.4@1021.04,359 D27.6@1021.04,361.5 D27.5@1021.04,363 D27.4@1021.04,364.5 D26.6@1021.04,367 D26.5@1021.04,368.5 D26.4@1021.04,370 D25.6@1021.04,372.5 D25.5@1021.04,374 D25.4@1021.04,375.5 D24.6@1021.04,378 D24.5@1021.04,379.5 D24.4@1021.04,381 D23.6@1021.04,383.5 D23.5@1021.04,385 D23.4@1021.04,386.5 D22.6@1021.04,389 D22.5@1021.04,390.5 D22.4@1021.04,392 D21.6@1021.04,394.5 D21.5@1021.04,396 D21.4@1021.04,397.5 D20.6@1021.04,400 D20.5@1021.04,401.5 D20.4@1021.04,403 D19.6@1021.04,405.5 D19.5@1021.04,407 D19.4@1021.04,408.5 D18.6@1021.04,411 D18.5@1021.04,412.5 D18.4@1021.04,414 D17.6@1021.04,416.5 D17.5@1021.04,418 D17.4@1021.04,419.5 D16.6@1021.04,422 D16.5@1021.04,423.5 D16.4@1021.04,425 D15.6@1021.04,427.5 D15.5@1021.04,429 D15.4@1021.04,430.5 D14.6@1021.04,433 D14.5@1021.04,434.5 D14.4@1021.04,436 D13.6@1021.04,438.5 D13.5@1021.04,440 D13.4@1021.04,441.5 D12.6@1021.04,444 D12.5@1021.04,445.5 D12.4@1021.04,447 D11.6@1021.04,449.5 D11.5@1021.04,451 D11.4@1021.04,452.5 D10.6@1021.04,455 D10.5@1021.04,456.5 D10.4@1021.04,458 D9.6@1021.04,460.5 D9.5@1021.04,462 D9.4@1021.04,463.5 D8.6@1021.04,466 D8.5@1021.04,467.5 D8.4@1021.04,469 D7.6@1021.04,471.5 D7.5@1021.04,473 D7.4@1021.04,474.5 D6.6@1021.04,477 D6.5@1021.04,478.5 D6.4@1021.04,480 v1@1021.04,481.228 ; D1.4@1021.04,507.5 D1.5@1021.04,506 D1.6@1021.04,504.5 D2.4@1021.04,502 D2.5@1021.04,500.5 D2.6@1021.04,499 D3.4@1021.04,496.5 D3.5@1021.04,495 D3.6@1021.04,493.5 D4.4@1021.04,491 D4.5@1021.04,489.5 D4.6@1021.04,488 D5.4@1021.04,485.5 D5.5@1021.04,484 ; v1(1021.347,481.19) v1@1021.04,481.228 ; J2.10@1029,479.14 J2.9@1029,481.68 1024.108,481.68 1023.798,481.99 1023.798,482.298 1022.096,484 D5.5@1021.04,484 ; v1@1021.04,481.228 D5.6@1021.04,482.5 D5.5@1021.04,484
  Bottom Layer w0.254: J1.10@1017,479.14 1018.885,481.025 1021.182,481.025 v1(1021.347,481.19)
pads on no net: U1.11 U1.12 U1.14 U2.11 U2.12 U2.14 U3.11 U3.12 U3.14 U4.11 U4.12 U4.14 U5.11 U5.12 U5.14 U6.11 U6.12 U6.14 U7.11 U7.12 U7.14 U8.11 U8.12 U8.14 U9.11 U9.12 U9.14 U10.11 U10.12 U10.14 U11.11 U11.12 U11.14 U12.11 U12.12 U12.14 U13.11 U13.12 U13.14 U14.11 U14.12 U14.14 U15.11 U15.12 U15.14 U16.11 U16.12 U16.14 U17.11 U17.12 U17.14 U18.11 U18.12 U18.14 U19.11 U19.12 U19.14 U20.11 U20.12 U20.14 U21.11 U21.12 U21.14 U22.11 U22.12 U22.14 U23.11 U23.12 U23.14 U24.11 U24.12 U24.14 U25.11 U25.12 U25.14 U26.11 U26.12 U26.14 U27.11 U27.12 U27.14 U28.11 U28.12 U28.14 U29.11 U29.12 U29.14 U30.11 U30.12 U30.14
copper on no net: | length 396
  Top Layer w0.254: 781.525,570.284 789.148,570.284 791.689,570.284 792.452,570.284 ; 781.525,580.43 789.148,580.43 791.689,580.43 792.452,580.43 ; 781.525,590.575 789.148,590.575 791.689,590.575 792.452,590.575 ; 781.525,600.72 789.148,600.72 791.689,600.72 792.452,600.72 ; 781.525,610.866 789.148,610.866 791.689,610.866 792.452,610.866 ; 781.525,620.969 789.148,620.969 791.689,620.969 792.452,620.969 ; 781.525,631.115 789.148,631.115 791.689,631.115 792.452,631.115 ; 781.525,641.26 789.148,641.26 791.689,641.26 792.452,641.26 ; 781.525,651.405 789.148,651.405 791.689,651.405 792.452,651.405 ; 789.148,560.139 791.689,560.139 792.452,560.139 ; 792.452,558.11 792.452,562.168 ; 792.452,568.255 792.452,572.313 ; 792.452,578.4 792.452,582.459 ; 792.452,588.546 792.452,592.604 ; 792.452,598.691 792.452,602.75 ; 792.452,608.837 792.452,612.853 ; 792.452,618.94 792.452,622.998 ; 792.452,629.085 792.452,633.144 ; 792.452,639.231 792.452,643.289 ; 792.452,649.376 792.452,653.435 ; 793.468,558.11 793.468,562.168 ; 793.468,560.139 794.231,560.139 796.772,560.139 804.395,560.139 804.395,570.284 ; 793.468,568.255 793.468,572.313 ; 793.468,570.284 794.231,570.284 796.772,570.284 804.395,570.284 ; 793.468,578.4 793.468,582.459 ; 793.468,580.43 794.231,580.43 796.772,580.43 804.395,580.43 ; 793.468,588.546 793.468,592.604 ; 793.468,590.575 794.231,590.575 796.772,590.575 804.395,590.575 ; 793.468,598.691 793.468,602.75 ; 793.468,600.72 794.231,600.72 796.772,600.72 804.395,600.72 ; 793.468,608.837 793.468,612.853 ; 793.468,610.866 794.231,610.866 796.772,610.866 804.395,610.866 ; 793.468,618.94 793.468,622.998 ; 793.468,620.969 794.231,620.969 796.772,620.969 804.395,620.969 ; 793.468,629.085 793.468,633.144 ; 793.468,631.115 794.231,631.115 796.772,631.115 804.395,631.115 ; 793.468,639.231 793.468,643.289 ; 793.468,641.26 794.231,641.26 796.772,641.26 804.395,641.26 ; 793.468,649.376 793.468,653.435 ; 793.468,651.405 794.231,651.405 796.772,651.405 804.395,651.405 ; 812.019,656.478 804.395,656.478 804.395,651.405 ; 804.395,570.284 804.395,580.43 ; 804.395,580.43 804.395,590.575 ; 804.395,590.575 804.395,600.72 ; 804.395,600.72 804.395,610.866 ; 804.395,610.866 804.395,620.969 ; 804.395,620.969 804.395,631.115 ; 804.395,631.115 804.395,641.26 ; 804.395,641.26 804.395,651.405

## Polygon pours and split planes (outlines as drawn)
GND on Bottom Layer "GND" (solid, remove dead copper, pour order 4): 1015.5,510 1023,510 1023,174.5 1015.5,174.5
VCC on Bottom Layer "VCC" (solid, remove dead copper, pour order 2): 1023.5,509 1023.5,174.5 1030.5,174.5 1030.5,509
VCCBAT on Top Layer "VCCBATTOP" (solid, remove dead copper, pour order 6): 1016.951,510.075 1029,510.075 1029,175.075 1017.451,175.075 1017.451,509.575 1016.951,509.575

## Other copper
Top Layer:
  region: 780,555
  region: 780,555
  region: 780,555
  region: 780,555
  region: 780,555
  region: 780,555
  region: 780,555
  region: 780,555
  region: 780,555
  region: 780,555
  region: 780,555
  region: 780,555
  region: 780,555
  region: 780,555
  region: 780,555
  region: 780,555
  region: 780,555
  region: 780,555
  region: 780,555
  region: 780,555
  region: 780,555
  region: 780,555
  region: 780,555
  region: 780,555
  region: 780,555
  region: 780,555
  region: 780,555
  region: 780,555
  region: 780,555
  region: 780,555
  region: 780,555
  region: 780,555
  region: 780,555
  region: 780,555
  region: 780,555
  region: 780,555
  region: 780,555
  region: 780,555
  region: 780,555
  region: 780,555
  region: 780,555
  region: 780,555
  region: 780,555
  region: 780,555
  region: 780,555
  region: 780,555
  region: 780,555
  region: 780,555
  region: 780,555
  region: 780,555
  region: 780,555
  region: 780,555
  region: 780,555
  region: 780,555

## Silkscreen, mask and mechanical layers (free items; w line width, h text height)
Top Overlay:
  text "support@neuralcloudcomputing.com" at 1029.5,178.5 h0.51 r90
  text "LightShow LED" at 1019.5,177.5 h0.51
  text "Neural Cloud Computing" at 1018,176.5 h0.51
  text "Version 1.0" at 1020,175.5 h0.51
Mechanical 15:
  lines w0.254: 1015.5,514.246 1015.5,514.754 ; 1017.024,513.992 1015.5,514.5 ; 1017.024,515.008 1015.5,514.5 ; 1018.023,514.5 1015.5,514.5 ; 1027.977,514.5 1030.5,514.5 ; 1028.976,513.992 1030.5,514.5 ; 1028.976,515.008 1030.5,514.5 ; 1030.5,514.246 1030.5,514.754 ; 1033.992,175.524 1034.5,174 ; 1033.992,508.476 1034.5,510 ; 1034.246,174 1034.754,174 ; 1034.246,510 1034.754,510 ; 1034.5,336.134 1034.5,174 ; 1034.5,347.866 1034.5,510 ; 1035.008,175.524 1034.5,174 ; 1035.008,508.476 1034.5,510
  text "15 (mm)" at 1018.277,513.586 h1.52
  text "336 (mm)" at 1035.414,336.388 h1.52 r90